# Altium PCB INC-IO1212001.PcbDoc
Units mm, origin at the board's own origin, x right, y up, seen from the top; angles counter-clockwise.
Board outline 135.25 x 80.28 mm, 2 copper layers (Top Layer, Bottom Layer); 161 components, 137 nets, 502 pads, 72 vias.
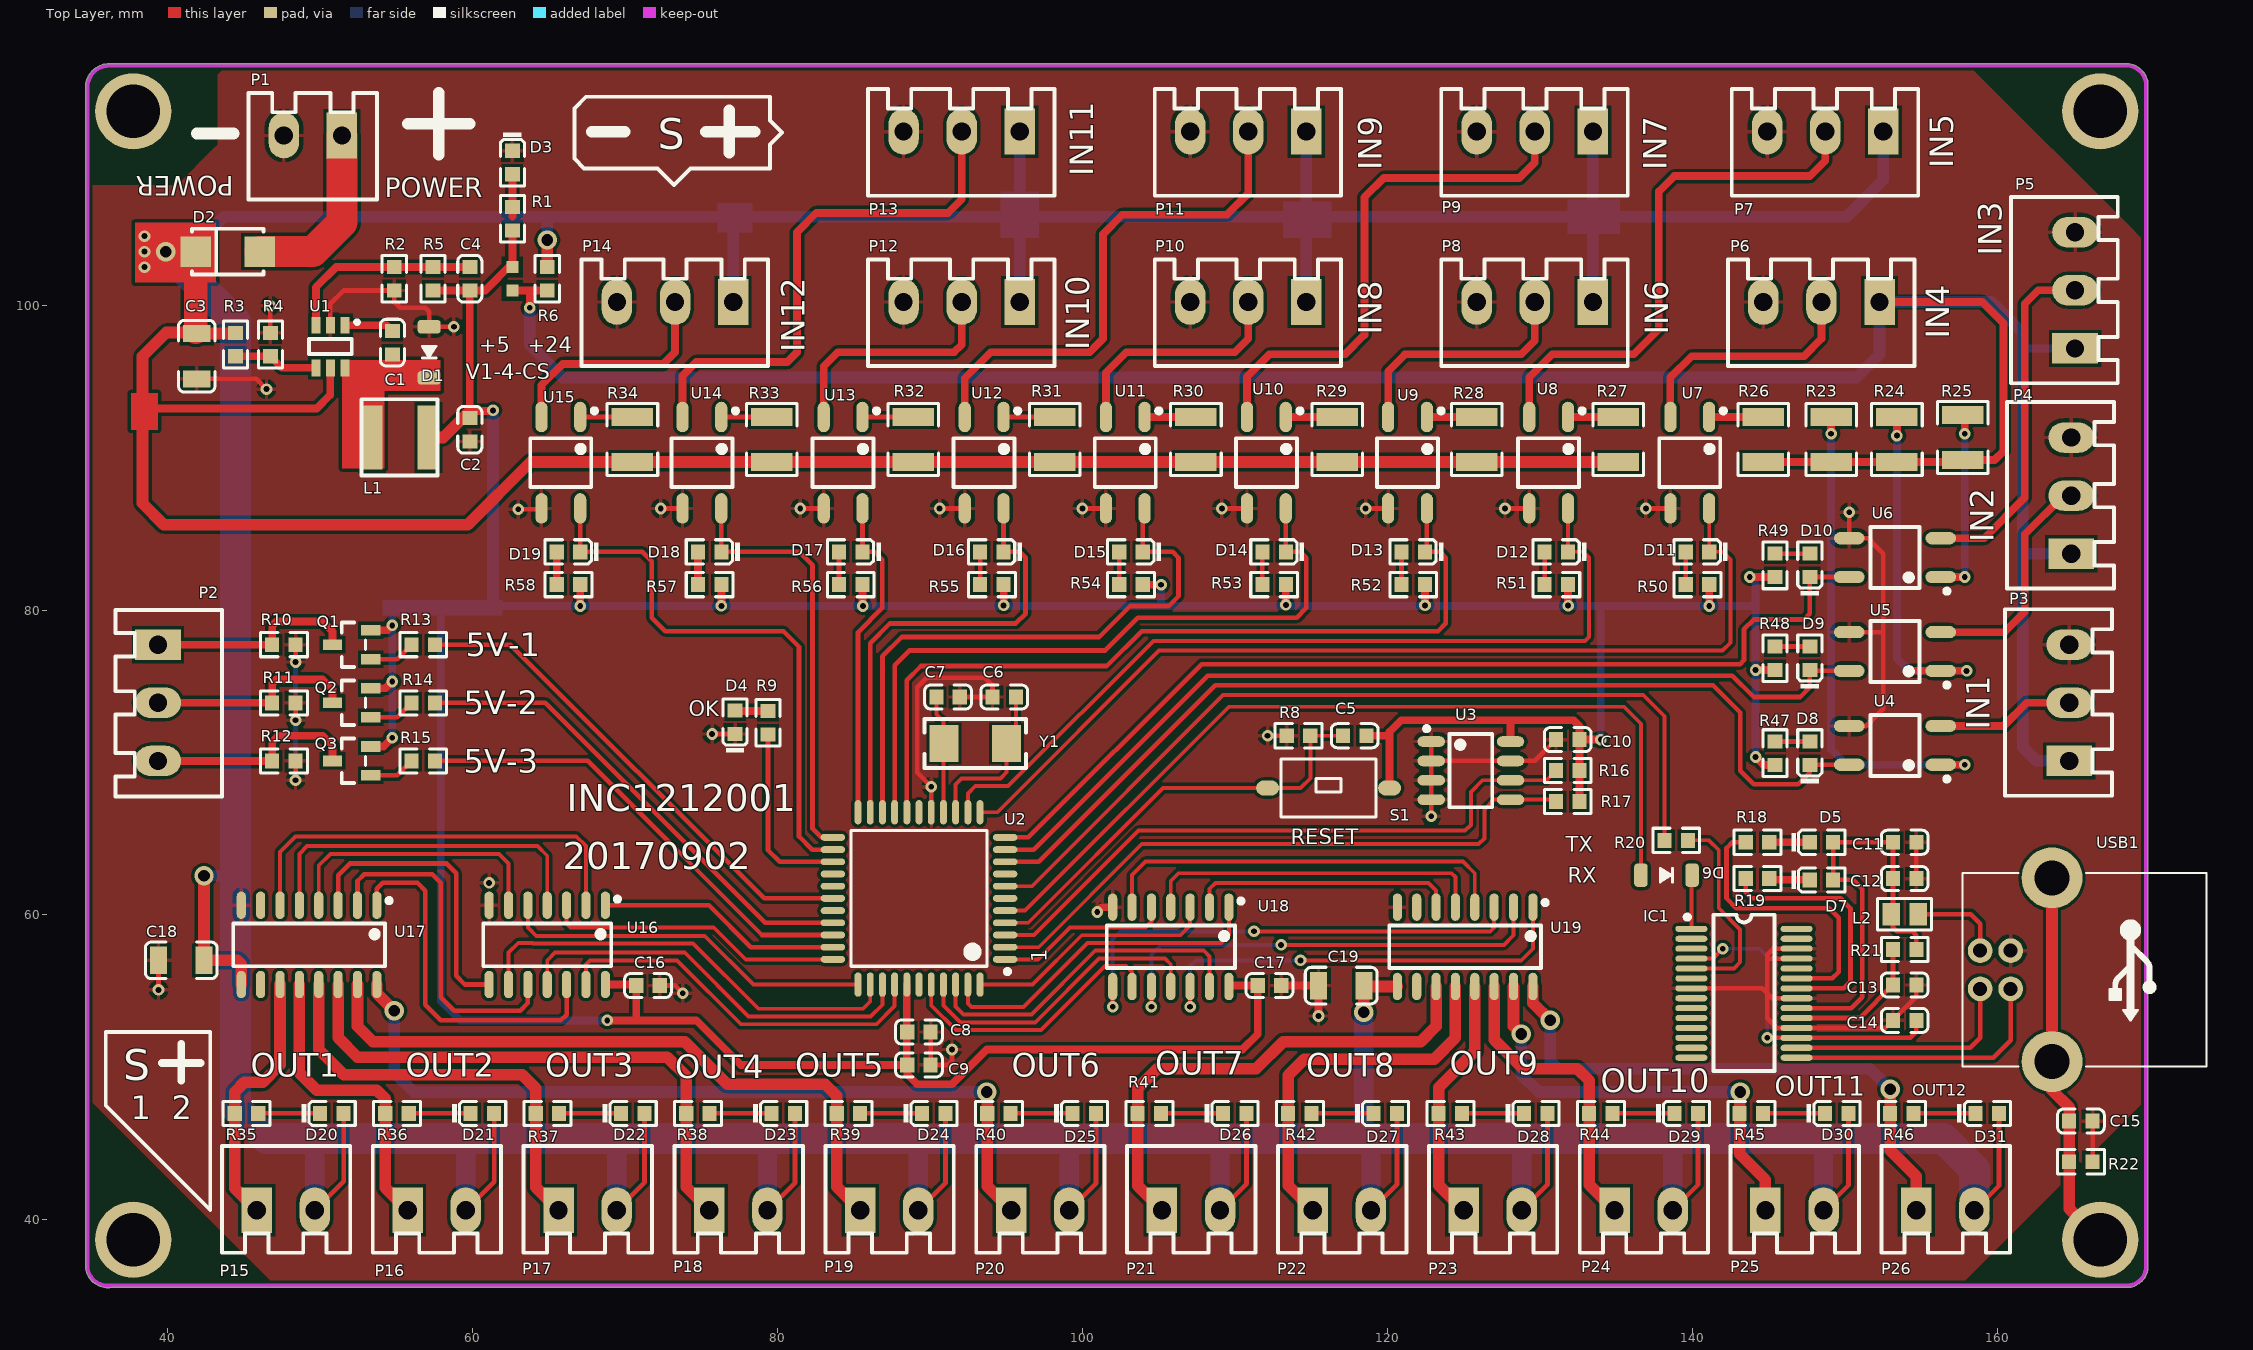
[diagram p0: Top Layer view]
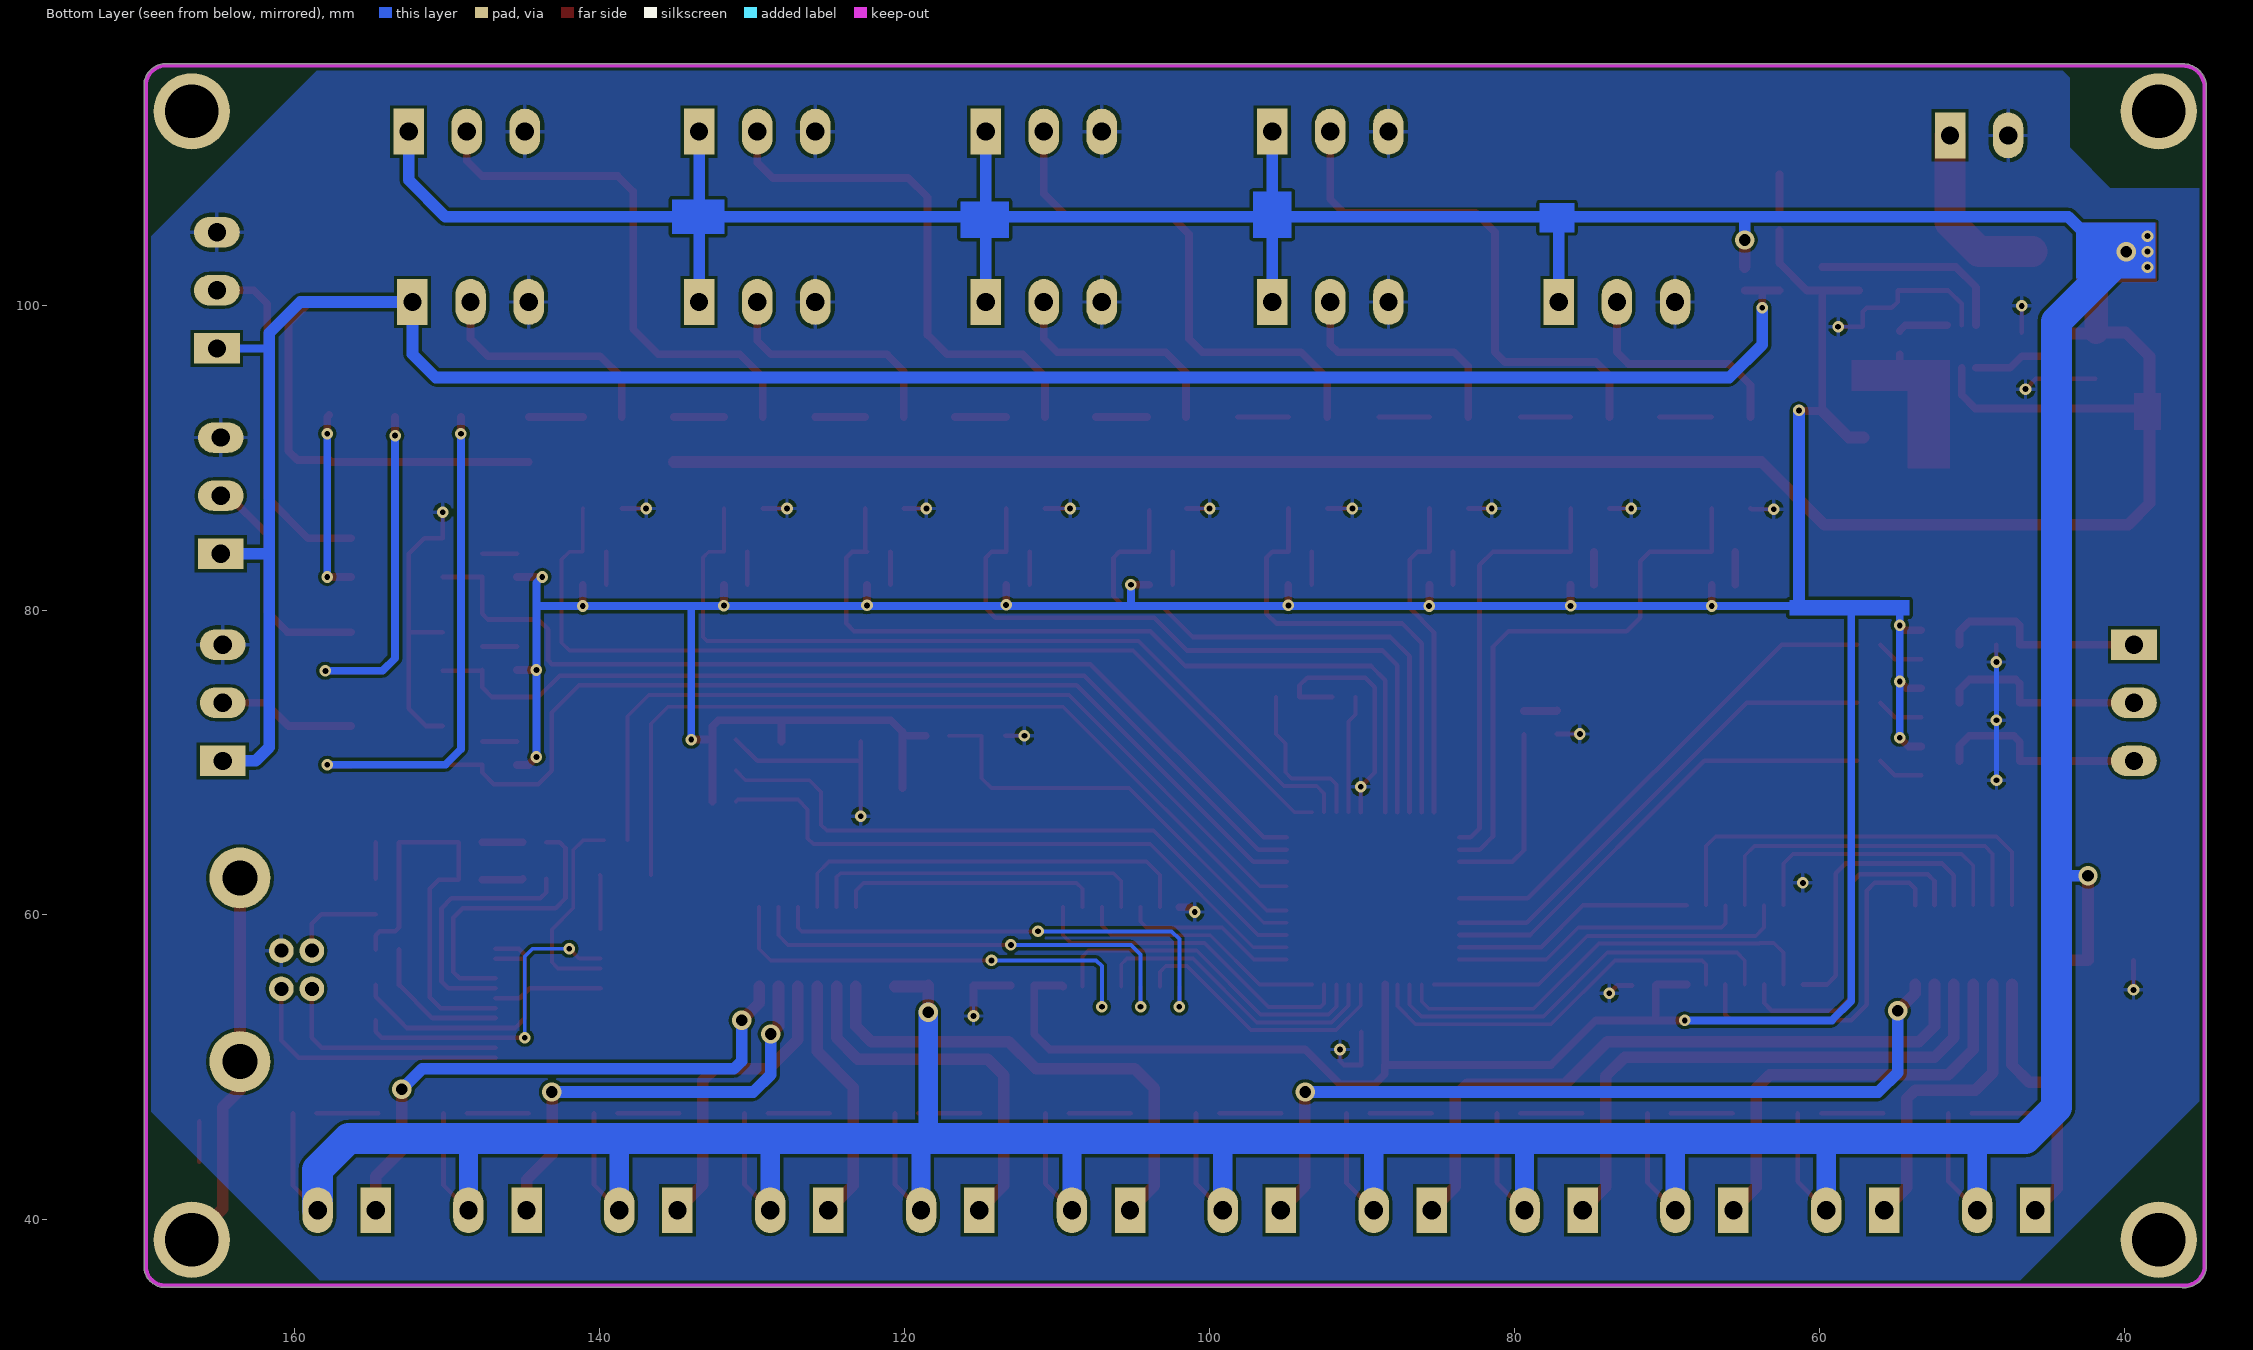
[diagram p1: Bottom Layer view, seen from below]
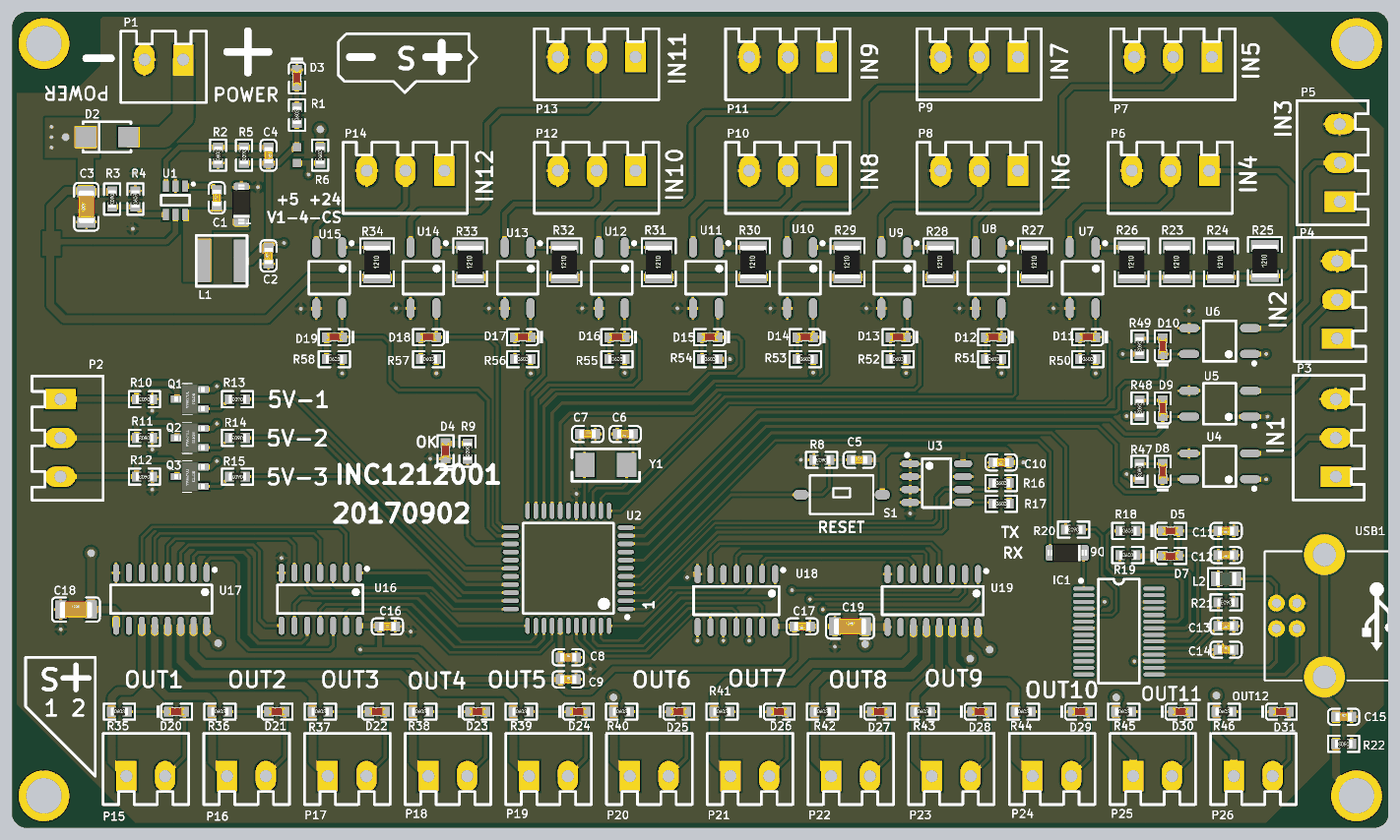
[diagram p2: 3D render of the assembled board from above, using the file's embedded part models]

## Layer stack, top to bottom
Top Solder: solder mask 0.0102, Solder Resist, Dk 3.5
Top Layer: signal copper 0.0356
Dielectric 1: dielectric 0.32, FR-4, Dk 4.8
Bottom Layer: signal copper 0.0356
Bottom Solder: solder mask 0.0102, Solder Resist, Dk 3.5

## Board outline
34.618,114.3 cw(c34.745,114.3) 34.618,114.302 34.618,114.374 cw(c34.745,114.374) 34.623,114.412 cw(c36.171,114.276) 36.036,115.825 cw(c36.074,115.703) 36.074,115.83 36.147,115.83 cw(c36.171,114.276) 36.196,115.83 cw(c36.171,114.276) 36.197,115.83 36.196,115.83 168.267,115.83 cw(c168.436,114.393) 169.871,114.569 cw(c169.745,114.554) 169.872,114.554 169.872,36.958 ccw(c168.51,36.938) 169.872,36.959 169.872,36.958 cw(c168.51,36.938) 169.873,36.938 cw(c168.51,36.938) 168.531,35.576 cw(c168.529,35.703) 168.529,35.576 36.332,35.576 cw(c36.097,37.055) 34.619,36.809 cw(c34.745,36.83) 34.62,36.856 cw(c34.745,36.883) 34.618,36.883

## Design rules (kind name [scope] priority, off if disabled: settings)
Clearance [All] p1: gap=0.203 ignorepadtopadclearanceinfootprint=FALSE except(0: Arc-Hole Track-Hole SMDPad-Hole THPad-Hole Via-Hole Fill-Hole Poly-Hole Region-Hole Text-Hole)
PolygonConnect [All] p1: connectstyle=Relief reliefconductorwidth=0.254 reliefentries=4 polygonreliefangle="90 Angle" airgapwidth=0.254
RoutingVias [All] p1: holewidth=0.381 width=0.762 viastyle="Through Hole" minholewidth=0.711 minwidth=1.27 maxholewidth=0.711 maxwidth=1.27
SolderMaskExpansion [All] p1: expansion=0.102
Width [All] p1: maxlimit=2.032 minlimit=0.254 preferedwidth=0.305 minimp=50.000000 maximp=50.000000 favimp=50.000000
30 further rules are at their usual default settings.

## Components (designator, comment, footprint, x,y, rotation, side; value= is the part's Value field where it differs from the comment)
C1 "100nF (104) 10% 50V" 0603_C 54.737,97.536 r90 top
C2 "10uF(106) ±20% 6.3V" 0603_C 59.817,91.821 r90 top
C3 "10uF(106) ±10% 25V" 1206_C 41.91,96.647 r90 top
C4 "33pF(330) ±5% 50V" 0603_C 59.817,101.727 r270 top
C5 "10uF(106) ±20% 6.3V" 0603_C 117.856,71.755 r0 top
C6 "22pF ±5% 50V" 0603_C 94.869,74.295 r180 top
C7 "22pF ±5% 50V" 0603_C 91.186,74.295 r0 top
C8 "10uF(106) ±20% 6.3V" 0603_C 89.273,52.324 r0 top
C9 "100nF (104) 10% 50V" 0603_C 89.273,50.165 r0 top
C10 "100nF (104) 10% 50V" 0603_C 131.826,71.501 r180 top
C11 "10uF(106) ±20% 6.3V" 0603_C 153.924,64.77 r180 top
C12 "100nF (104) 10% 50V" 0603_C 153.924,62.382 r180 top
C13 "100nF (104) 10% 50V" 0603_C 153.924,53.086 r0 top
C14 "100nF (104) 10% 50V" 0603_C 153.924,55.41 r180 top
C15 "100nF (104) 10% 50V" 0603_C 165.481,46.482 r0 top
C16 "100nF (104) 10% 50V" 0603_C 71.501,55.372 r180 top
C17 "100nF (104) 10% 50V" 0603_C 112.268,55.372 r180 top
C18 "10uF(106) ±10% 25V" 1206_C 40.894,57.023 r0 top
C19 "10uF(106) ±10% 25V" 1206_C 116.967,55.372 r0 top
D1 "1N5819" SOD-123 57.15,96.901 r270 top
D2 "SS34" SMA(DO-214AC)_S1 43.942,103.505 r0 top
D3 "红灯 0603" 0603_LED_S1 62.611,109.347 r270 top
D4 "蓝灯 0603" 0603_LED_S1 77.216,72.636 r90 top
D5 "蓝灯 0603" 0603_LED_S1 148.463,64.77 r0 top
D6 "1N5819" SOD-123 138.303,62.611 r0 top
D7 "红灯 0603" 0603_LED_S1 148.463,62.305 r0 top
D8 "红灯 0603" 0603_LED_S1 147.701,70.612 r90 top
D9 "红灯 0603" 0603_LED_S1 147.701,76.835 r90 top
D10 "红灯 0603" 0603_LED_S1 147.701,82.931 r90 top
D11 "红灯 0603" 0603_LED_S1 140.335,83.82 r180 top
D12 "红灯 0603" 0603_LED_S1 131.08,83.82 r180 top
D13 "红灯 0603" 0603_LED_S1 121.698,83.82 r180 top
D14 "红灯 0603" 0603_LED_S1 112.57,83.82 r180 top
D15 "红灯 0603" 0603_LED_S1 103.188,83.82 r180 top
D16 "红灯 0603" 0603_LED_S1 94.059,83.82 r180 top
D17 "红灯 0603" 0603_LED_S1 84.804,83.82 r180 top
D18 "红灯 0603" 0603_LED_S1 75.549,83.82 r180 top
D19 "红灯 0603" 0603_LED_S1 66.286,83.82 r180 top
D20 "红灯 0603" 0603_LED_S1 50.77,46.99 r0 top
D21 "红灯 0603" 0603_LED_S1 60.64,46.99 r0 top
D22 "红灯 0603" 0603_LED_S1 70.51,46.99 r0 top
D23 "红灯 0603" 0603_LED_S1 80.38,46.99 r0 top
D24 "红灯 0603" 0603_LED_S1 90.25,46.99 r0 top
D25 "红灯 0603" 0603_LED_S1 100.12,46.99 r0 top
D26 "红灯 0603" 0603_LED_S1 109.991,46.99 r0 top
D27 "红灯 0603" 0603_LED_S1 119.861,46.99 r0 top
D28 "红灯 0603" 0603_LED_S1 129.731,46.99 r0 top
D29 "红灯 0603" 0603_LED_S1 139.601,46.99 r0 top
D30 "红灯 0603" 0603_LED_S1 149.471,46.99 r0 top
D31 "红灯 0603" 0603_LED_S1 159.341,46.99 r0 top
IC1 "FT232RL" SSOP-28_208mil 143.383,54.864 r270 top
L1 "3.3uH  ±20%" L5020 55.245,91.313 r0 top
L2 "600Ω ±20% @100MHz" 0805_L 153.924,60.058 r0 top
P1 "Header 2" GX-2P-3.81MM 51.435,111.125 r180 top
P2 "Header 3" GX-3P-3.81MM 39.37,77.724 r270 top
P3 "Header 3" GX-3P-3.81MM 164.719,70.104 r90 top
P4 "Header 3" GX-3P-3.81MM 164.846,83.693 r90 top
P5 "Header 3" GX-3P-3.81MM 165.1,97.155 r90 top
P6 "Header 3" GX-3P-3.81MM 152.273,100.203 r180 top
P7 "Header 3" GX-3P-3.81MM 152.527,111.379 r180 top
P8 "Header 3" GX-3P-3.81MM 133.477,100.203 r180 top
P9 "Header 3" GX-3P-3.81MM 133.477,111.379 r180 top
P10 "Header 3" GX-3P-3.81MM 114.681,100.203 r180 top
P11 "Header 3" GX-3P-3.81MM 114.681,111.379 r180 top
P12 "Header 3" GX-3P-3.81MM 95.885,100.203 r180 top
P13 "Header 3" GX-3P-3.81MM 95.885,111.379 r180 top
P14 "Header 3" GX-3P-3.81MM 77.089,100.203 r180 top
P15 "Header 2" GX-2P-3.81MM 45.847,40.64 r0 top
P16 "Header 2" GX-2P-3.81MM 55.741,40.64 r0 top
P17 "Header 2" GX-2P-3.81MM 65.636,40.64 r0 top
P18 "Header 2" GX-2P-3.81MM 75.53,40.64 r0 top
P19 "Header 2" GX-2P-3.81MM 85.425,40.64 r0 top
P20 "Header 2" GX-2P-3.81MM 95.319,40.64 r0 top
P21 "Header 2" GX-2P-3.81MM 105.214,40.64 r0 top
P22 "Header 2" GX-2P-3.81MM 115.108,40.64 r0 top
P23 "Header 2" GX-2P-3.81MM 125.003,40.64 r0 top
P24 "Header 2" GX-2P-3.81MM 134.897,40.64 r0 top
P25 "Header 2" GX-2P-3.81MM 144.792,40.64 r0 top
P26 "Header 2" GX-2P-3.81MM 154.686,40.64 r0 top
Q1 "SS8550 Y2" SOT-23(SOT-23-3) 52.07,77.724 r0 top
Q2 "SS8550 Y2" SOT-23(SOT-23-3) 52.07,73.914 r0 top
Q3 "SS8550 Y2" SOT-23(SOT-23-3) 52.07,70.104 r0 top
R1 "1.5KΩ (1501) ±1%" 0603_R 62.611,105.664 r90 top
R2 "30K ±1%" 0603_R 54.864,101.727 r90 top
R3 "47KΩ (4702) ±1%" 0603_R 44.45,97.409 r270 top
R4 "10KΩ (1002) ±1%" 0603_R 46.736,97.409 r90 top
R5 "160K ±1%" 0603_R 57.404,101.727 r270 top
R6 "0Ω (0R0) ±1%" 0603_R 64.897,101.727 r90 top
R8 "10KΩ (1002) ±1%" 0603_R 114.173,71.755 r180 top
R9 "1.5KΩ (1501) ±1%" 0603_R 79.375,72.604 r270 top
R10 "1.5KΩ (1501) ±1%" 0603_R 47.625,77.724 r180 top
R11 "1.5KΩ (1501) ±1%" 0603_R 47.625,73.914 r180 top
R12 "1.5KΩ (1501) ±1%" 0603_R 47.625,70.104 r180 top
R13 "4.7KΩ (4701) ±1%" 0603_R 56.769,77.724 r180 top
R14 "4.7KΩ (4701) ±1%" 0603_R 56.769,73.914 r180 top
R15 "4.7KΩ (4701) ±1%" 0603_R 56.769,70.104 r180 top
R16 "4.7KΩ (4701) ±1%" 0603_R 131.826,69.469 r0 top
R17 "4.7KΩ (4701) ±1%" 0603_R 131.826,67.437 r0 top
R18 "1.5KΩ (1501) ±1%" 0603_R 144.272,64.77 r0 top
R19 "1.5KΩ (1501) ±1%" 0603_R 144.272,62.382 r0 top
R20 "330Ω (3300) ±1%" 0603_R 138.938,64.897 r180 top
R21 "10KΩ (1002) ±1%" 0603_R 153.924,57.734 r180 top
R22 "47KΩ (4702) ±1%" 0603_R 165.481,43.815 r180 top
R23 "4.7KΩ (4701) ±1%" 1210_R 149.098,91.186 r90 top
R24 "4.7KΩ (4701) ±1%" 1210_R 153.416,91.186 r90 top
R25 "4.7KΩ (4701) ±1%" 1210_R 157.734,91.313 r90 top
R26 "4.7KΩ (4701) ±1%" 1210_R 144.653,91.186 r90 top
R27 "4.7KΩ (4701) ±1%" 1210_R 135.128,91.186 r90 top
R28 "4.7KΩ (4701) ±1%" 1210_R 125.857,91.186 r90 top
R29 "4.7KΩ (4701) ±1%" 1210_R 116.713,91.186 r90 top
R30 "4.7KΩ (4701) ±1%" 1210_R 107.442,91.186 r90 top
R31 "4.7KΩ (4701) ±1%" 1210_R 98.171,91.186 r90 top
R32 "4.7KΩ (4701) ±1%" 1210_R 88.9,91.186 r90 top
R33 "4.7KΩ (4701) ±1%" 1210_R 79.629,91.186 r90 top
R34 "4.7KΩ (4701) ±1%" 1210_R 70.485,91.186 r90 top
R35 "10KΩ (1002) ±1%" 0603_R 45.168,46.99 r0 top
R36 "10KΩ (1002) ±1%" 0603_R 55.038,46.99 r0 top
R37 "10KΩ (1002) ±1%" 0603_R 64.908,46.99 r0 top
R38 "10KΩ (1002) ±1%" 0603_R 74.778,46.99 r0 top
R39 "10KΩ (1002) ±1%" 0603_R 84.649,46.99 r0 top
R40 "10KΩ (1002) ±1%" 0603_R 94.519,46.99 r0 top
R41 "10KΩ (1002) ±1%" 0603_R 104.389,46.99 r0 top
R42 "10KΩ (1002) ±1%" 0603_R 114.259,46.99 r0 top
R43 "10KΩ (1002) ±1%" 0603_R 124.129,46.99 r0 top
R44 "10KΩ (1002) ±1%" 0603_R 133.999,46.99 r0 top
R45 "10KΩ (1002) ±1%" 0603_R 143.869,46.99 r0 top
R46 "10KΩ (1002) ±1%" 0603_R 153.739,46.99 r0 top
R47 "1.5KΩ (1501) ±1%" 0603_R 145.415,70.612 r270 top
R48 "1.5KΩ (1501) ±1%" 0603_R 145.415,76.835 r270 top
R49 "1.5KΩ (1501) ±1%" 0603_R 145.415,82.931 r270 top
R50 "1.5KΩ (1501) ±1%" 0603_R 140.335,81.661 r0 top
R51 "1.5KΩ (1501) ±1%" 0603_R 131.08,81.661 r0 top
R52 "1.5KΩ (1501) ±1%" 0603_R 121.698,81.661 r0 top
R53 "1.5KΩ (1501) ±1%" 0603_R 112.57,81.661 r0 top
R54 "1.5KΩ (1501) ±1%" 0603_R 103.188,81.661 r0 top
R55 "1.5KΩ (1501) ±1%" 0603_R 94.059,81.661 r0 top
R56 "1.5KΩ (1501) ±1%" 0603_R 84.804,81.661 r0 top
R57 "1.5KΩ (1501) ±1%" 0603_R 75.549,81.661 r0 top
R58 "1.5KΩ (1501) ±1%" 0603_R 66.286,81.661 r0 top
S1 "SW-PB" SW-3*6*2.5 120.142,68.326 r180 top
U1 "MP2451DT-LF-Z" SOT-23-6 50.673,97.282 r90 top
U2 "STC12C5A60S2-35I" LQFP-44_10x10x08P 89.281,61.087 r90 top
U3 "EEPROM/AT24C128" SOIC-8_150mil 125.476,69.469 r270 top
U4 "EL357N(B)(TA)-G" SOP-4_P2.54 153.289,71.12 r180 top
U5 "EL357N(B)(TA)-G" SOP-4_P2.54 153.289,77.279 r180 top
U6 "EL357N(B)(TA)-G" SOP-4_P2.54 153.289,83.439 r180 top
U7 "EL357N(B)(TA)-G" SOP-4_P2.54 139.827,89.662 r270 top
U8 "EL357N(B)(TA)-G" SOP-4_P2.54 130.572,89.662 r270 top
U9 "EL357N(B)(TA)-G" SOP-4_P2.54 121.317,89.662 r270 top
U10 "EL357N(B)(TA)-G" SOP-4_P2.54 112.062,89.662 r270 top
U11 "EL357N(B)(TA)-G" SOP-4_P2.54 102.806,89.662 r270 top
U12 "EL357N(B)(TA)-G" SOP-4_P2.54 93.551,89.662 r270 top
U13 "EL357N(B)(TA)-G" SOP-4_P2.54 84.296,89.662 r270 top
U14 "EL357N(B)(TA)-G" SOP-4_P2.54 75.041,89.662 r270 top
U15 "EL357N(B)(TA)-G" SOP-4_P2.54 65.786,89.662 r270 top
U16 "74HC04" SOIC-14_150mil 64.897,58.039 r180 top
U17 "ULN2003AFWG" SOIC-16_150mil 49.276,58.039 r180 top
U18 "74HC04" SOIC-14_150mil 105.791,57.912 r180 top
U19 "ULN2003AFWG" SOIC-16_150mil 125.095,57.912 r180 top
USB1 "USB-B" USB-b 158.877,57.658 r270 top
Y1 "11.0592MHZ 20PF 20PPM" SMD-5032_2P 92.964,71.247 r0 top

## Footprints (in the part's own frame and the unit in brackets; to place one, negate y for a bottom-side part, rotate by r counter-clockwise, add the part's x,y. Pads: shape width x height; smd on the part's side, far side on the other; paste and mask are expansions set on the pad)
0603_C [mm]
  rect 0.93x0.98 smd: 1(-0.77,0) 2(0.77,0)
  silkscreen extent -1.53,-0.79 1.54,0.79, body extent -0.8,-0.4 0.8,0.4, height 0.3
0603_LED_S1 [mm]
  rect 0.93x0.98 smd: A(0.77,0) K(-0.77,0)
  silkscreen extent -1.98,-0.79 1.54,0.79, body extent -0.8,-0.4 0.8,0.4, height 0.6
0603_R [mm]
  rect 0.93x0.98 smd: 1(-0.77,0) 2(0.77,0)
  silkscreen extent -1.53,-0.79 1.54,0.79, body extent -0.85,-0.4 0.85,0.4, height 0.56
0805_L [mm]
  rect 1.16x1.47 smd: 1(-0.89,0) 2(0.89,0)
  silkscreen extent -1.77,-1.04 1.77,1.03, body extent -1.02,-0.64 1.03,0.64, height 0.6
1206_C [mm]
  rect 1.13x1.8 smd: 1(-1.49,0) 2(1.49,0)
  silkscreen extent -2.36,-1.2 2.35,1.2, body extent -1.6,-0.81 1.6,0.79, height 1
1210_R [mm]
  rect 1.16x2.72 smd: 1(-1.475,0) 2(1.475,0)
  silkscreen extent -2.35,-1.66 2.36,1.66, body extent -1.6,-1.25 1.6,1.25, height 0.6
GX-2P-3.81MM [mm]
  rect 2x3 hole 1.2: 1(0,0)
  oval 2x3 hole 1.2: 2(3.81,0)
  silkscreen extent -2.29,-2.79 6.13,4.21
GX-3P-3.81MM [mm]
  rect 2x3 hole 1.2: 1(0,0)
  oval 2x3 hole 1.2: 2(3.81,0) 3(7.62,0)
  silkscreen extent -2.29,-2.79 9.94,4.21
L5020 [mm]
  rect 1.4x4.2 smd: 1(-1.85,0) 2(1.85,0)
  silkscreen extent -2.54,-2.49 2.46,2.51
LQFP-44_10x10x08P [mm]
  oval 0.45x1.6 smd: 1(-4,-5.65) 2(-3.2,-5.65) 3(-2.4,-5.65) 4(-1.6,-5.65) 5(-0.8,-5.65) 6(0,-5.65) 7(0.8,-5.65) 8(1.6,-5.65) 9(2.4,-5.65) 10(3.2,-5.65) 11(4,-5.65) 23(4,5.65) 24(3.2,5.65) 25(2.4,5.65) 26(1.6,5.65) 27(0.8,5.65) 28(0,5.65) 29(-0.8,5.65) 30(-1.6,5.65) 31(-2.4,5.65) 32(-3.2,5.65) 33(-4,5.65)
  oval 1.6x0.45 smd: 12(5.65,-4) 13(5.65,-3.2) 14(5.65,-2.4) 15(5.65,-1.6) 16(5.65,-0.8) 17(5.65,0) 18(5.65,0.8) 19(5.65,1.6) 20(5.65,2.4) 21(5.65,3.2) 22(5.65,4) 34(-5.65,4) 35(-5.65,3.2) 36(-5.65,2.4) 37(-5.65,1.6) 38(-5.65,0.8) 39(-5.65,0) 40(-5.65,-0.8) 41(-5.65,-1.6) 42(-5.65,-2.4) 43(-5.65,-3.2) 44(-5.65,-4)
  silkscreen extent -4.95,-5.95 4.45,4.45
SMA(DO-214AC)_S1 [mm]
  rect 2x2 smd: 1(2.1,0) 2(-2.1,0)
  silkscreen extent -2.35,-1.5 2.35,1.5
SMD-5032_2P [mm]
  rect 1.9x2.4 smd: 1(-2.05,0) 2(2.05,0)
  silkscreen extent -3.32,-1.6 3.32,1.6
SOD-123 [mil]
  rrect50% 35x60 smd: 1(-66,0) 2(66,0)
  silkscreen extent -16,-18 16,18, body extent -77,-35 77,35, height 46
SOIC-8_150mil [mm]
  oval 0.7x1.8 smd: 1(-1.905,-2.6) 2(-0.635,-2.6) 3(0.635,-2.6) 4(1.905,-2.6) 5(1.905,2.6) 6(0.635,2.6) 7(-0.635,2.6) 8(-1.905,2.6)
  silkscreen extent -2.9,-3.05 2.4,1.4
SOIC-14_150mil [mm]
  oval 0.6x1.8 smd: 1(-3.81,-2.6) 2(-2.54,-2.6) 3(-1.27,-2.6) 4(0,-2.6) 5(1.27,-2.6) 6(2.54,-2.6) 7(3.81,-2.6) 8(3.81,2.6) 9(2.54,2.6) 10(1.27,2.6) 11(0,2.6) 12(-1.27,2.6) 13(-2.54,2.6) 14(-3.81,2.6)
  silkscreen extent -4.75,-3.15 4.2,1.4
SOIC-16_150mil [mm]
  oval 0.6x1.8 smd: 1(-4.445,-2.6) 2(-3.175,-2.6) 3(-1.905,-2.6) 4(-0.635,-2.6) 5(0.635,-2.6) 6(1.905,-2.6) 7(3.175,-2.6) 8(4.445,-2.6) 9(4.445,2.6) 10(3.175,2.6) 11(1.905,2.6) 12(0.635,2.6) 13(-0.635,2.6) 14(-1.905,2.6) 15(-3.175,2.6) 16(-4.445,2.6)
  silkscreen extent -5.4,-3.05 4.97,1.4
SOP-4_P2.54 [mm]
  oval 2x0.8 smd: 1(-3,1.27) 2(-3,-1.27) 3(3,-1.27) 4(3,1.27)
  silkscreen extent -3.55,-2 1.6,2.35
SOT-23(SOT-23-3) [mm]
  rect 1.25x0.7 smd: 1(1.25,-0.95) 2(1.25,0.95) 3(-1.25,0)
  silkscreen extent -0.65,-1.46 0.9,1.46, body extent -1.5,-1.5 1.5,1.5, height 1.3
SOT-23-6 [mm]
  rect 1.1x0.6 smd: 1(1.4,-0.95) 2(1.4,0) 3(1.4,0.95) 4(-1.4,0.95) 5(-1.4,0) 6(-1.4,-0.95)
  silkscreen extent -0.5,-1.87 1.72,1.4
SSOP-28_208mil [mm]
  oval 0.4x2.1 smd mask+0.051: 1(-4.225,-3.45) 2(-3.575,-3.45) 3(-2.925,-3.45) 4(-2.275,-3.45) 5(-1.625,-3.45) 6(-0.975,-3.45) 7(-0.325,-3.45) 8(0.325,-3.45) 9(0.975,-3.45) 10(1.625,-3.45) 11(2.275,-3.45) 12(2.925,-3.45) 13(3.575,-3.45) 14(4.225,-3.45) 15(4.225,3.45) 16(3.575,3.45) 17(2.925,3.45) 18(2.275,3.45) 19(1.625,3.45) 20(0.975,3.45) 21(0.325,3.45) 22(-0.325,3.45) 23(-0.975,3.45) 24(-1.625,3.45) 25(-2.275,3.45) 26(-2.925,3.45) 27(-3.575,3.45) 28(-4.225,3.45)
  silkscreen extent -5.15,-3.86 5.1,2
SW-3*6*2.5 [mm]
  oval 1.5x1 smd: 1(0,0) 2(8,0)
  silkscreen extent 0.89,-1.91 7.11,1.91
USB-b [mm]
  round 1.626 hole 0.914 mask+0.025: 1(0,0) 2(2.5,0) 3(2.5,2) 4(0,2)
  round 4 hole 2.3 mask+0: 5(7.27,4.71) 6(-4.77,4.71)
  silkscreen extent -5.1,-1.16 7.6,14.84, body extent -5.94,-0.71 8.44,14.99, height 11.5

## Part data
C1 C4: library part "0603 10nF (103) 10% 50V", "贴片电容"
C2 C3 C8 C9 C10 C11 C12 C13 C14 C15 C16 C17 C18 C19: library part Cap, "Capacitor"
C5: library part "0603 10uF (106) 10% 10V", "贴片电容"
C6 C7: library part CAP, "Capacitor"
D1 D2 D6: library part "D Schottky", "Schottky Diode"
D3 D7 D8 D9 D10 D11 D12 D13 D14 D15 D16 D17 D18 D19 D20 D21 D22 D23 D24 D25 D26 D27 D28 D29 D30 D31: library part "0603 红灯", "发光二极管"
D4 D5: library part "0603 蓝灯", "发光二极管"
L1: library part Inductor, "Inductor"
L2 R9 R18 R19 R20 R21 R22: library part Res2, "Resistor"
P1 P15 P16 P17 P18 P19 P20 P21 P22 P23 P24 P25 P26: "Header, 2-Pin"
P2 P3 P4 P5 P6 P7 P8 P9 P10 P11 P12 P13 P14: "Header, 3-Pin"
Q1 Q2 Q3: library part "SOT-23 SS8550 Y2", "三极管"
R1 R8 R10 R11 R12 R13 R14 R15 R16 R17 R35 R36 R37 R38 R39 R40 R41 R42 R43 R44 R45 R46: library part "0603 1KΩ (1001) 1%", "贴片电阻"
R2 R5 R6 R23 R24 R25 R26 R27 R28 R29 R30 R31 R32 R33 R34 R47 R48 R49 R50 R51 R52 R53 R54 R55 R56 R57 R58: library part "0603 18KΩ (1802) 1%", "贴片电阻"
R3 R4: library part "0603 100KΩ (1003) 1%", "贴片电阻"
S1: "Switch"
U1: "DC-DCоƬ"
U2: "MCU"
U3: library part EEPROM/AT24C256C-SSHL-T, "EEPROM"
U4 U5 U6 U7 U8 U9 U10 U11 U12 U13 U14 U15: "贴片光耦"
U17 U19: "大电流驱动"
USB1: library part USB-6
Y1: library part "SMD-5032_2P 11.0592MHZ 20PF 20PPM", "贴片晶振"

## Free pads (board coordinates)
  round 5 hole 3.5: 0(37.745,38.703) 0(37.745,112.703) 0(166.745,38.703) 0(166.745,112.703)
  rect 0.8x0.8 smd: 1(62.611,102.497) 2(62.611,100.957)

## Via types
v1: diameter 0.762, hole 0.381, Top Layer to Bottom Layer, tented both sides, 62 vias
v2: diameter 1.27, hole 0.762, Top Layer to Bottom Layer, tented both sides, 10 vias

## Nets (pads, with @x,y where several pads share a name; then routed paths per layer and width w, separated by ;. In a path a pad name is that pad's centre, name@x,y a point inside that pad or via, vN(x,y) a via of type N, cw(c..) or ccw(c..) an arc to the next point about the centre after c; other vN are vias at no path point)
5V_1: P2.1 Q1.3 R10.2 | length 14
  Top Layer w0.508: P2.1 R10.2 46.855,78.986 47.117,79.248 50.165,79.248 50.82,78.593 Q1.3
5V_2: P2.2 Q2.3 R11.2 | length 14
  Top Layer w0.508: P2.2 R11.2 46.855,75.176 47.117,75.438 50.165,75.438 50.82,74.783 Q2.3
5V_3: P2.3 Q3.3 R12.2 | length 14.1
  Top Layer w0.508: P2.3 R12.2 46.855,71.366 47.244,71.755 50.165,71.755 50.82,71.1 Q3.3
+5V: C2.2 C4.2 C5.2 C8.1 C9.1 C10.1 C16.2 C17.2 L1.2 pad.1 Q1.2 Q2.2 Q3.2 R1.1 R5.2 R16.2 R17.2 R47.2 R48.2 R49.2 R50.2 R51.2 R52.2 R53.2 R54.2 R55.2 R56.2 R57.2 R58.2 S1.1 U2.38 U3.8 U16.14 U18.14 | length 301.8
  Top Layer w0.508: Q3.2 54.163,71.054 v1(54.737,71.628) ; Q2.2 54.29,74.864 v1(54.737,75.311) ; Q1.2 54.417,78.674 v1(54.737,78.994) ; R5.2 C4.2 ; v1(61.341,93.091) 61.307,93.057 59.817,93.057 C4.2 ; R1.1 62.611,102.743 60.825,100.957 C4.2 ; v1(67.056,80.264) R58.2 ; U16.14 C16.2@70.664,55.439 ; v1(68.834,53.086) 74.676,53.086 77.597,50.165 C9.1 ; 70.731,53.094 C16.2 ; v1(76.319,80.272) R57.2 ; v1@85.574,80.288 R56.2 ; U2.38 88.481,50.187 C9.1 ; v1(94.829,80.304) R55.2 ; R54.2 v1(105.156,81.661) ; U18.14 109.661,55.372 C17.2 111.498,52.189 110.49,51.181 93.726,51.181 91.44,48.895 89.154,48.895 88.503,49.546 C9.1 ; v1(113.34,80.335) R53.2 ; C5.2 120.142,71.755 ; S1.1 120.142,71.755 ; v1(122.468,80.304) R52.2 ; U3.8 128.076,72.711 128.016,72.771 ; v1(131.85,80.288) R51.2 ; R17.2 R16.2 C10.1 ; v1(133.985,71.501) C10.1 ; v1(141.105,80.264) R50.2 ; v1(143.764,82.169) 145.407,82.169 R49.2 ; v1(144.145,70.358) 144.661,69.842 R47.2 ; v1(144.145,76.065) R48.2 ; 120.142,71.755 120.142,72.009 120.904,72.771 128.016,72.771 ; 128.016,72.771 132.207,72.771 132.596,72.382 C10.1
  Top Layer w0.762: L1.2 58.073,91.313 59.817,93.057
  Bottom Layer w0.508: v1(54.737,71.628) v1(54.737,75.311) v1(54.737,78.994) 54.737,80.391 57.912,80.391 ; 59.055,80.264 v1(67.056,80.264) v1(85.598,80.264) 105.156,80.264 ; 61.341,80.391 57.912,80.391 ; v1(68.834,53.086) 59.182,53.086 57.912,54.356 57.912,80.391 ; v1(105.156,81.661) 105.156,80.264 ; v1(133.985,71.501) 133.985,80.264 ; v1(143.764,82.169) 144.145,81.788 144.145,80.391 ; v1(144.145,70.358) v1(144.145,76.065) 144.145,80.391 ; 105.156,80.264 131.85,80.264 v1(141.105,80.264) 144.018,80.264 144.145,80.391
  Bottom Layer w0.762: 61.341,80.391 v1(61.341,93.091)
+24V: C3.2 C18.2 C19.2 D2.2 D20.A D21.A D22.A D23.A D24.A D25.A D26.A D27.A D28.A D29.A D30.A D31.A P7.1 P8.1 P9.1 P10.1 P11.1 P12.1 P13.1 P14.1 P15.2 P16.2 P17.2 P18.2 P19.2 P20.2 P21.2 P22.2 P23.2 P24.2 P25.2 P26.2 R3.1 R6.2 R27.1 R28.1 R29.1 R30.1 R31.1 R32.1 R33.1 R34.1 U1.5 U17.9 U19.9 | length 629.5
  Top Layer w0.305: P15.2 51.54,42.523 D20.A ; P16.2 61.41,42.498 D21.A ; P17.2 71.28,42.474 D22.A ; P18.2 81.15,42.45 D23.A ; P19.2 91.02,42.425 D24.A ; P20.2 100.89,42.401 D25.A ; P21.2 110.761,42.377 D26.A ; P22.2 120.631,42.352 D27.A ; P23.2 130.501,42.328 D28.A ; P24.2 140.371,42.304 D29.A ; P25.2 150.241,42.279 D30.A ; P26.2 160.111,42.255 D31.A
  Top Layer w0.508: 38.354,93.218 49.784,93.218 50.673,94.107 U1.5 ; 40.547,98.205 40.479,98.137 C3.2
  Top Layer w0.762: C3.2@41.842,98.205 40.547,98.205 39.912,98.205 38.354,96.647 38.354,93.218 38.354,86.995 39.751,85.598 59.69,85.598 63.803,89.711 R34.1 R33.1 R32.1 R31.1 R30.1 R29.1 R28.1 R27.1 ; C3.2 44.408,98.137 R3.1 ; v2(42.384,62.577) C18.2 44.577,57.023 44.831,56.769 U17.9 ; R6.2 v2(64.897,104.267) ; v2(118.457,53.628) C19.2 118.517,55.312 U19.9
  Top Layer w1.524: C3.2@41.842,98.205 D2.2
  Bottom Layer w0.762: 42.164,104.267 43.688,105.791 64.897,105.791 ; v2(42.384,62.577) 44.289,62.577 ; 49.53,45.339 49.657,45.212 ; 59.309,45.339 59.551,45.097 ; v2(64.897,104.267) 64.897,105.791 ; P14.1 77.089,105.664 ; 79.34,45.304 79.375,45.339 ; 89.235,45.293 89.281,45.339 ; P12.1 95.885,105.791 ; P13.1 95.885,105.791 ; P10.1 114.681,105.791 ; P11.1 114.681,105.791 ; P8.1 133.477,105.791 ; P9.1 133.477,105.791 ; P7.1 152.527,108.204 150.114,105.791 133.477,105.791 ; 64.897,105.791 95.885,105.791 ; 95.885,105.791 114.681,105.791 ; 114.681,105.791 133.477,105.791
  Bottom Layer w1.27: P15.2 49.657,45.212 ; P16.2 59.551,45.097 ; P17.2 69.446,45.316 ; P18.2 79.34,45.304 ; P19.2 89.235,45.293 ; P20.2 99.129,45.27 ; P21.2 109.024,45.154 ; 118.457,45.432 v2(118.457,53.628) ; P22.2 118.918,45.039 ; P23.2 128.813,45.05 ; P24.2 138.707,44.981 ; P25.2 148.602,45.224
  Bottom Layer w2.032: v2(39.878,103.505) 44.45,98.933 44.45,47.371 46.482,45.339 49.53,45.339 59.309,45.339 79.375,45.339 89.281,45.339 156.464,45.339 158.496,43.307 P26.2
  other v1: 38.481,102.489 38.481,103.505 38.481,104.521
GND: C2.1 C3.1 C6.2 C7.2 C8.2 C9.2 C10.2 C11.1 C12.1 C13.1 C14.1 C15.2 C16.1 C17.1 C18.1 C19.1 D1.1 D3.K D4.K IC1.7 IC1.18 IC1.21 IC1.25 IC1.26 P1.2 P3.3 P4.3 P5.3 P6.3 P7.3 P8.3 P9.3 P10.3 P11.3 P12.3 P13.3 P14.3 R2.1 R4.2 R8.2 R10.1 R11.1 R12.1 R22.1 U1.2 U2.16 U3.1 U3.2 U3.3 U3.4 U3.7 U4.3 U5.3 U6.3 U7.3 U8.3 U9.3 U10.3 U11.3 U12.3 U13.3 U14.3 U15.3 U16.7 U17.8 U18.7 U19.8 USB1.4 | length 142.3
  Top Layer w0.305: v1(39.404,55.084) C18.1 ; C3.1 45.813,95.157 v1(46.482,94.488) ; R4.2 v1(46.736,99.949) ; v1(48.387,68.834) 48.395,68.842 R12.1 ; v1(48.395,72.771) R11.1 ; v1(48.395,76.589) R10.1 ; U1.2 50.673,100.076 51.554,100.957 R2.1 54.864,100.203 55.245,99.822 56.896,99.822 57.15,99.568 D1.1 v1(58.776,98.577) ; v1(62.992,86.614) 64.468,86.614 U15.3 ; C16.1 73.279,55.372 v1(73.787,54.864) ; v1(72.342,86.662) U14.3 ; v1(75.708,71.866) D4.K ; v1(81.486,86.662) U13.3 ; C8.2 C9.2 91.186,50.165 91.44,50.419 v1(91.44,51.181) ; U2.16 v1(90.081,68.415) 89.154,69.342 89.154,74.93 89.789,75.565 93.599,75.565 94.099,75.065 C6.2 C7.2 ; v1(90.63,86.662) U12.3 ; v1(99.997,86.662) U11.3 ; v1(109.141,86.662) U10.3 ; v1(112.141,71.755) R8.2 ; v1(118.57,86.662) U9.3 ; v1(122.876,66.481) U3.4 U3.3 U3.2 ; U3.1 U3.2 ; v1(127.714,86.662) U8.3 ; C10.2 129.659,70.104 U3.7 U3.2 ; v1(136.954,86.662) U7.3 ; IC1.7 144.582,55.189 144.907,54.864 ; 144.918,57.139 IC1.25 ; IC1.21 145.232,54.539 144.907,54.864 ; IC1.26 145.292,57.789 144.907,57.404 144.907,54.864 ; U4.3 151.384,72.39 152.527,73.533 152.527,83.693 151.511,84.709 U6.3 v1(150.289,86.408) ; U5.3 152.463,78.549 ; C14.1 154.694,54.626 C13.1 152.657,52.589 IC1.18 145.531,52.589 144.907,53.213 144.907,54.864 ; C12.1 C11.1 ; R22.1 C15.2
  Top Layer w0.508: v1(100.965,60.198) 101.279,60.512 U18.7 ; C17.1 C19.1 v1(115.477,53.374)
  Bottom Layer w0.305: v1(48.387,68.834) 48.387,76.581 v1(48.395,76.589)
  other v1: 61.087,62.103
IN1: D8.K U2.9 U4.4 | length 65.9
  Top Layer w0.305: U2.9 97.142,63.487 108.712,75.057 141.351,75.057 143.129,73.279 143.129,69.469 144.018,68.58 146.939,68.58 147.701,69.342 D8.K 147.709,69.85 U4.4
IN2: D9.K U2.10 U5.4 | length 62.1
  Top Layer w0.305: U2.10 96.799,64.287 108.204,75.692 142.621,75.692 144.018,74.295 147.066,74.295 147.701,74.93 D9.K 147.757,76.01 U5.4
IN3: D10.K U2.11 U6.4 | length 65
  Top Layer w0.305: U2.11 96.456,65.087 107.823,76.454 143.129,76.454 143.383,76.708 143.383,78.74 144.018,79.375 147.32,79.375 147.701,79.756 D10.K 147.709,82.169 U6.4
IN4: D11.K U2.12 U7.4 | length 63.7
  Top Layer w0.254: U2.12 94.423,66.737 105.029,77.343 141.986,77.343 142.494,77.851 142.494,83.312 141.986,83.82 D11.K 141.105,86.654 U7.4
IN5: D12.K U2.13 U8.4 | length 55.8
  Top Layer w0.254: U2.13 92.481,67.97 92.964,68.453 95.123,68.453 104.648,77.978 132.969,77.978 133.223,78.232 133.223,83.439 132.842,83.82 D12.K 131.85,86.654 U8.4
IN6: D13.K U2.18 U9.4 | length 54.3
  Top Layer w0.305: U2.18 88.481,75.4 89.408,76.327 101.6,76.327 103.886,78.613 123.317,78.613 123.825,79.121 123.825,83.439 123.444,83.82 D13.K 122.587,83.939 U9.4
IN7: D14.K U2.19 U10.4 | length 45.8
  Top Layer w0.305: U2.19 87.681,76.378 88.646,77.343 101.473,77.343 103.632,79.502 114.046,79.502 114.681,80.137 114.681,83.439 114.3,83.82 D14.K 113.34,86.654 U10.4
IN8: D15.K U2.20 U11.4 | length 39
  Top Layer w0.305: U2.20 86.881,76.975 88.138,78.232 101.092,78.232 103.124,80.264 105.664,80.264 106.299,80.899 106.299,83.439 105.918,83.82 D15.K U11.4@103.957,86.543
IN9: D16.K U2.21 U12.4 | length 30.2
  Top Layer w0.305: U2.21 86.081,77.826 87.376,79.121 95.631,79.121 96.266,79.756 96.266,83.439 95.885,83.82 D16.K 94.821,83.828 U12.4
IN10: D17.K U2.22 U13.4 | length 21.6
  Top Layer w0.305: U2.22 85.281,78.55 86.868,80.137 86.868,83.312 86.36,83.82 D17.K 85.574,86.654 U13.4
IN11: D18.K U2.23 U14.4 | length 28
  Top Layer w0.305: U14.4 76.311,83.828 D18.K 81.407,83.82 82.296,82.931 82.296,65.659 82.868,65.087 U2.23
IN12: D19.K U2.24 U15.4 | length 37
  Top Layer w0.305: U15.4 D19.K 71.12,83.82 71.755,83.185 71.755,79.502 72.644,78.613 80.391,78.613 81.407,77.597 81.407,65.151 82.271,64.287 U2.24
INPUT1: P3.2 U4.2 | length 9.1
  Top Layer w0.508: U4.2 160.401,72.39 161.925,73.914 P3.2
INPUT2: P4.2 U5.2 | length 15.2
  Top Layer w0.508: U5.2 160.464,78.549 161.798,79.883 161.798,84.963 164.338,87.503 P4.2
INPUT3: P5.2 U6.2 | length 23
  Top Layer w0.508: U6.2 159.131,84.709 161.798,87.376 161.798,100.076 162.687,100.965 P5.2
INPUT4: P6.2 U7.2 | length 16
  Top Layer w0.508: U7.2 138.557,95.25 139.954,96.647 147.32,96.647 148.463,97.79 P6.2
INPUT5: P7.2 U8.2 | length 35.1
  Top Layer w0.508: U8.2 129.302,95.266 130.81,96.774 136.144,96.774 137.795,98.425 137.795,107.442 138.811,108.458 147.701,108.458 148.717,109.474 P7.2
INPUT6: P8.2 U9.2 | length 16
  Top Layer w0.508: U9.2 120.047,95.663 121.158,96.774 128.778,96.774 129.667,97.663 P8.2
INPUT7: P9.2 U10.2 | length 34.6
  Top Layer w0.508: U10.2 110.792,95.298 112.268,96.774 117.221,96.774 118.491,98.044 118.491,107.061 119.761,108.331 128.651,108.331 129.667,109.347 P9.2
INPUT8: P10.2 U11.2 | length 15.6
  Top Layer w0.508: U11.2 101.536,95.567 102.87,96.901 109.982,96.901 110.871,97.79 P10.2
INPUT9: P11.2 U12.2 | length 34.2
  Top Layer w0.508: U12.2 92.281,95.202 93.98,96.901 100.457,96.901 101.346,97.79 101.346,104.648 102.616,105.918 109.474,105.918 110.871,107.315 P11.2
INPUT10: P12.2 U13.2 | length 15.8
  Top Layer w0.508: U13.2 83.026,95.98 83.947,96.901 91.567,96.901 92.075,97.409 P12.2
INPUT11: P13.2 U14.2 | length 34.9
  Top Layer w0.508: U14.2 73.771,95.361 74.676,96.266 80.645,96.266 81.28,96.901 81.28,104.775 82.55,106.045 91.186,106.045 92.075,106.934 P13.2
INPUT12: P14.2 U15.2 | length 15
  Top Layer w0.508: U15.2 64.516,94.742 65.913,96.139 72.517,96.139 73.279,96.901 P14.2
LED: R9.2 U2.25 | length 12.2
  Top Layer w0.305: R9.2 79.375,64.249 80.137,63.487 U2.25
MCU_RX: D6.1 U2.5 | length 57.6
  Top Layer w0.254: U2.5 96.228,60.287 109.601,73.66 135.509,73.66 136.627,72.542 D6.1
MCU_TX: R20.2 U2.7 | length 57.1
  Top Layer w0.254: U2.7 96.685,61.887 109.22,74.422 136.779,74.422 138.168,73.033 R20.2
NetC1_1: C1.1 D1.2 L1.1 U1.6 | length 3.8
  Top Layer w0.508: 54.734,95.882 54.737,95.885 ; C1.1 54.737,95.885 ; D1.2 55.016,95.225 54.737,95.504 54.737,95.885
NetC1_2: C1.2 U1.1 | length 3.3
  Top Layer w0.508: U1.1 54.361,98.682 C1.2
NetC4_1: C4.1 R2.2 R5.1 U1.3 | length 13.1
  Top Layer w0.508: U1.3 49.723,101.158 51.062,102.497 R2.2 C4.1
NetC5_1: C5.1 R8.1 S1.2 U2.4 | length 28.9
  Top Layer w0.254: U2.4 96.444,59.487 105.283,68.326 S1.2 114.3,68.326 114.943,68.969 R8.1 C5.1
NetC6_1: C6.1 U2.14 Y1.2 | length 10.7
  Top Layer w0.254: U2.14 91.681,68.567 92.075,68.961 94.615,68.961 95.014,69.36 Y1.2 95.639,71.872 C6.1
NetC7_1: C7.1 U2.15 Y1.1 | length 7.8
  Top Layer w0.254: C7.1 90.416,73.16 90.881,72.695 U2.15
NetC11_2: C11.2 C12.2 D5.A D7.A IC1.20 L2.1 R21.1 | length 28.5
  Top Layer w0.305: IC1.20 150.409,53.889 151.13,54.61 151.13,61.722 150.547,62.305 D7.A D5.A C11.2 C12.2 153.154,60.058 153.154,59.19 153.416,58.928 154.432,58.928 154.694,58.666 R21.1
NetC14_2: C14.2 IC1.19 R21.2 | length 9.5
  Top Layer w0.305: IC1.19 150.983,53.239 C14.2 R21.2
NetC15_1: C15.1 pad.0@166.745,38.703 R22.2 USB1.5 USB1.6 | length 25
  Top Layer w0.762: USB1.6 USB1.5 163.587,48.503 164.711,47.379 R22.2 164.711,40.737 pad.0@166.745,38.703
NetD3_A: D3.A R1.2 | length 2.8
  Top Layer w0.508: 62.611,105.816 R1.2 D3.A
NetD4_A: D4.A R9.1 | length 2.2
  Top Layer w0.508: D4.A 77.248,73.374 R9.1
NetD5_K: D5.K R18.2 | length 2.7
  Top Layer w0.508: R18.2 D5.K
NetD6_1: D6.2 IC1.1 | length 3.5
  Top Layer w0.254: IC1.1 139.933,62.565 D6.2
NetD7_K: D7.K R19.2 | length 2.7
  Top Layer w0.508: R19.2 145.119,62.305 D7.K
NetD8_A: D8.A R47.1 | length 2.3
  Top Layer w0.305: R47.1 D8.A
NetD9_A: D9.A R48.1 | length 2.3
  Top Layer w0.305: R48.1 D9.A
NetD10_A: D10.A R49.1 | length 2.3
  Top Layer w0.305: R49.1 D10.A
NetD11_A: D11.A R50.1 | length 2.2
  Top Layer w0.305: R50.1 D11.A
NetD12_A: D12.A R51.1 | length 2.2
  Top Layer w0.305: R51.1 D12.A
NetD13_A: D13.A R52.1 | length 2.2
  Top Layer w0.305: R52.1 D13.A
NetD14_A: D14.A R53.1 | length 2.2
  Top Layer w0.305: R53.1 D14.A
NetD15_A: D15.A R54.1 | length 2.2
  Top Layer w0.305: R54.1 D15.A
NetD16_A: D16.A R55.1 | length 2.2
  Top Layer w0.305: R55.1 D16.A
NetD17_A: D17.A R56.1 | length 2.2
  Top Layer w0.305: R56.1 D17.A
NetD18_A: D18.A R57.1 | length 2.2
  Top Layer w0.508: R57.1 D18.A
NetD19_A: D19.A R58.1 | length 2.2
  Top Layer w0.508: R58.1 D19.A
NetD20_K: D20.K R35.2 | length 4.1
  Top Layer w0.305: R35.2 D20.K
NetD21_K: D21.K R36.2 | length 4.1
  Top Layer w0.305: R36.2 D21.K
NetD22_K: D22.K R37.2 | length 4.1
  Top Layer w0.305: R37.2 D22.K
NetD23_K: D23.K R38.2 | length 4.1
  Top Layer w0.305: R38.2 D23.K
NetD24_K: D24.K R39.2 | length 4.1
  Top Layer w0.305: R39.2 D24.K
NetD25_K: D25.K R40.2 | length 4.1
  Top Layer w0.305: R40.2 D25.K
NetD26_K: D26.K R41.2 | length 4.1
  Top Layer w0.305: R41.2 D26.K
NetD27_K: D27.K R42.2 | length 4.1
  Top Layer w0.305: R42.2 D27.K
NetD28_K: D28.K R43.2 | length 4.1
  Top Layer w0.305: R43.2 D28.K
NetD29_K: D29.K R44.2 | length 4.1
  Top Layer w0.305: R44.2 D29.K
NetD30_K: D30.K R45.2 | length 4.1
  Top Layer w0.305: R45.2 D30.K
NetD31_K: D31.K R46.2 | length 4.1
  Top Layer w0.305: R46.2 D31.K
NetIC1_5: IC1.5 R20.1 | length 13.6
  Top Layer w0.254: R20.1 141.097,64.897 141.732,64.262 141.732,60.452 143.129,59.055 143.129,56.896 142.722,56.489 IC1.5
NetIC1_22: IC1.22 R19.1 | length 16.7
  Top Layer w0.305: R19.1 143.502,61.476 143.891,61.087 149.733,61.087 150.368,60.452 150.368,55.626 149.931,55.189 IC1.22
NetIC1_23: IC1.23 R18.1 | length 19.1
  Top Layer w0.305: R18.1 142.621,64.77 142.24,64.389 142.24,61.087 142.875,60.452 148.971,60.452 149.606,59.817 149.606,56.261 149.184,55.839 IC1.23
NetQ1_1: Q1.1 R13.2 | length 3.1
  Top Layer w0.305: Q1.1 55.049,76.774 R13.2
NetQ2_1: Q2.1 R14.2 | length 3.1
  Top Layer w0.305: Q2.1 55.049,72.964 R14.2
NetQ3_1: Q3.1 R15.2 | length 3.1
  Top Layer w0.305: Q3.1 55.049,69.154 R15.2
NetR3_2: R3.2 R4.1 U1.4 | length 5.6
  Top Layer w0.508: R3.2 R4.1 47.493,95.882 U1.4
NetR23_2: R23.2 U4.1 | length 32.6
  Top Layer w0.508: v1(149.098,91.567) R23.2 ; U4.1 v1(157.861,69.85)
  Bottom Layer w0.508: v1(149.098,91.567) 149.098,70.866 150.114,69.85 v1(157.861,69.85)
NetR24_2: R24.2 U5.1 | length 24.2
  Top Layer w0.508: v1@153.416,91.694 R24.2 ; 154.242,76.01 U5.1 v1(157.988,76.01)
  Bottom Layer w0.508: v1(153.416,91.44) 153.416,76.835 154.242,76.01 v1(157.988,76.01)
NetR25_2: R25.2 U6.1 | length 12.2
  Top Layer w0.508: U6.1 v1(157.861,82.169) ; R25.2 157.861,92.661 v1(157.861,91.567)
  Bottom Layer w0.508: v1(157.861,82.169) v1(157.861,91.567)
NetR26_2: R26.2 U7.1 | length 3.6
  Top Layer w0.508: U7.1 U7.1 R26.2
NetR27_2: R27.2 U8.1 | length 3.3
  Top Layer w0.508: U8.1 131.843,92.661 R27.2
NetR28_2: R28.2 U9.1 | length 3.3
  Top Layer w0.508: U9.1 122.588,92.661 R28.2
NetR29_2: R29.2 U10.1 | length 3.4
  Top Layer w0.508: U10.1 U10.1 R29.2
NetR30_2: R30.2 U11.1 | length 3.4
  Top Layer w0.508: U11.1 U11.1 R30.2
NetR31_2: R31.2 U12.1 | length 3.4
  Top Layer w0.305: U12.1 94.822,92.661 R31.2
NetR32_2: R32.2 U13.1 | length 3.3
  Top Layer w0.305: U13.1 U13.1 R32.2
NetR33_2: R33.2 U14.1 | length 3.3
  Top Layer w0.305: U14.1 U14.1 R33.2
NetR34_2: R34.2 U15.1 | length 3.4
  Top Layer w0.305: U15.1 U15.1 R34.2
O1: U16.2 U17.6 | length 28.1
  Top Layer w0.254: U17.6 47.371,64.135 48.387,65.151 66.802,65.151 67.437,64.516 U16.2
O2: U16.4 U17.5 | length 23.3
  Top Layer w0.254: U17.5 48.641,64.008 49.149,64.516 64.262,64.516 64.897,63.881 U16.4
O3: U16.6 U17.4 | length 18.4
  Top Layer w0.254: U17.4 49.911,63.246 50.673,64.008 61.722,64.008 62.357,63.373 U16.6
O4: U16.8 U17.3 | length 19.4
  Top Layer w0.305: U17.3 51.181,62.611 51.943,63.373 58.293,63.373 58.928,62.738 58.928,56.007 59.496,55.439 U16.8
O5: U16.10 U17.2 | length 22.5
  Top Layer w0.305: U17.2 52.451,62.23 52.883,62.662 57.353,62.662 57.912,62.103 57.912,54.61 58.801,53.721 63.119,53.721 63.627,54.229 U16.10
O6: U16.12 U17.1 | length 23.9
  Top Layer w0.305: U17.1 53.721,61.722 54.102,62.103 56.388,62.103 56.896,61.595 56.896,54.102 57.912,53.086 65.786,53.086 66.167,53.467 U16.12
O7: U18.2 U19.6 | length 17.5
  Top Layer w0.254: U18.2 108.331,61.722 108.712,62.103 122.682,62.103 123.19,61.595 U19.6
O8: U18.4 U19.5 | length 22.7
  Top Layer w0.254: U18.4 105.791,62.23 106.299,62.738 124.206,62.738 124.46,62.484 U19.5
O9: U18.6 U19.4 | length 27.5
  Top Layer w0.254: U18.6 103.251,62.611 104.14,63.5 124.968,63.5 125.73,62.738 U19.4
O10: U18.8 U19.3 | length 32.4
  Top Layer w0.254: v1(101.981,53.975) U18.8 ; v1(111.252,58.928) 126.746,58.928 127,59.182 U19.3
  Bottom Layer w0.254: v1(101.981,53.975) 101.981,58.42 102.489,58.928 v1(111.252,58.928)
O11: U18.10 U19.2 | length 30.9
  Top Layer w0.254: v1(104.521,53.975) U18.10 ; v1(113.03,58.039) 127.635,58.039 128.27,58.674 U19.2
  Bottom Layer w0.254: v1(104.521,53.975) 104.521,57.404 105.156,58.039 v1(113.03,58.039)
O12: U18.12 U19.1 | length 29.7
  Top Layer w0.254: v1(107.061,53.975) U18.12 ; v1(114.3,57.023) 128.778,57.023 129.54,57.785 U19.1
  Bottom Layer w0.254: v1(107.061,53.975) 107.061,56.642 107.442,57.023 v1(114.3,57.023)
OUT1: U2.32 U16.1 | length 16.1
  Top Layer w0.305: U16.1 75.505,60.639 78.257,57.887 U2.32
OUT2: U2.33 U16.3 | length 19.6
  Top Layer w0.254: U16.3 66.167,59.436 66.421,59.182 75.819,59.182 77.914,57.087 U2.33
OUT3: U2.34 U16.5 | length 24.7
  Top Layer w0.254: U16.5 63.627,59.182 64.177,58.632 75.226,58.632 78.421,55.437 U2.34
OUT4: U2.35 U16.9 | length 29.2
  Top Layer w0.254: U16.9 62.357,57.531 62.992,58.166 63.925,58.166 63.966,58.124 74.464,58.124 78.74,53.848 85.598,53.848 86.081,54.331 U2.35
OUT5: U2.36 U16.11 | length 27.2
  Top Layer w0.254: U16.11 64.897,57.023 65.405,57.531 73.914,57.531 78.105,53.34 86.106,53.34 86.881,54.115 U2.36
OUT5V_1: R13.1 U2.28 | length 33
  Top Layer w0.305: R13.1 62.484,77.724 79.121,61.087 U2.28
OUT5V_2: R14.1 U2.30 | length 32.1
  Top Layer w0.305: R14.1 64.77,73.914 79.197,59.487 U2.30
OUT5V_3: R15.1 U2.31 | length 30.8
  Top Layer w0.305: R15.1 67.564,70.104 78.981,58.687 U2.31
OUT6: U2.37 U16.13 | length 25.3
  Top Layer w0.254: U16.13 67.437,56.769 67.691,57.023 73.406,57.023 77.597,52.832 86.487,52.832 87.681,54.026 U2.37
OUT7: U2.43 U18.1 | length 22.2
  Top Layer w0.254: U2.43 92.481,54.204 92.71,53.975 96.139,53.975 100.33,58.166 109.093,58.166 109.601,58.674 U18.1
OUT8: U2.44 U18.3 | length 16.6
  Top Layer w0.254: U2.44 96.712,55.437 99.949,58.674 105.664,58.674 106.426,58.674 107.061,59.309 U18.3
OUT9: U2.1 U18.5 | length 11.6
  Top Layer w0.254: U2.1 97.092,57.087 99.187,59.182 104.14,59.182 104.521,59.563 U18.5
OUT10: U2.40 U18.9 | length 18.1
  Top Layer w0.254: U2.40 90.081,54.064 91.694,52.451 97.282,52.451 101.473,56.642 102.87,56.642 103.251,56.261 U18.9
OUT11: U2.41 U18.11 | length 20.1
  Top Layer w0.254: U2.41 90.881,54.07 91.992,52.959 96.901,52.959 101.092,57.15 105.41,57.15 105.791,56.769 U18.11
OUT12: U2.42 U18.13 | length 22.2
  Top Layer w0.254: U2.42 91.681,53.988 92.202,53.467 96.647,53.467 100.838,57.658 107.95,57.658 108.331,57.277 U18.13
OUTPUT1: P15.1 R35.1 U17.11 | length 17.3
  Top Layer w0.762: P15.1 44.398,42.089 R35.1 44.398,48.387 45.033,49.022 46.228,49.022 47.371,50.165 U17.11
OUTPUT2: P16.1 R36.1 U17.12 | length 20
  Top Layer w0.762: U17.12 48.641,49.657 49.784,48.514 53.721,48.514 54.268,47.967 R36.1 54.268,42.113 P16.1
OUTPUT3: P17.1 R37.1 U17.13 | length 28.2
  Top Layer w0.762: U17.13 49.911,51.181 51.562,49.53 63.246,49.53 64.138,48.638 R37.1 64.138,42.138 P17.1
OUTPUT4: P18.1 R38.1 U17.14 | length 36.8
  Top Layer w0.762: U17.14 51.181,51.943 52.451,50.673 72.771,50.673 74.008,49.436 R38.1 74.008,42.162 P18.1
OUTPUT5: P19.1 R39.1 U17.15 | length 44.2
  Top Layer w0.762: U17.15 52.451,52.705 53.467,51.689 73.914,51.689 76.708,48.895 83.117,48.895 83.879,48.133 R39.1 83.879,42.186 P19.1
OUTPUT6: P20.1 R40.1 U17.16 | length 54.1
  Top Layer w0.762: U17.16 53.721,54.864 v2(54.864,53.721) ; v2(93.726,48.387) 93.749,48.364 R40.1 93.749,42.211 P20.1
  Bottom Layer w0.762: v2(54.864,53.721) 54.864,49.657 56.134,48.387 v2(93.726,48.387)
OUTPUT7: P21.1 R41.1 U19.11 | length 32.5
  Top Layer w0.762: P21.1 103.619,42.235 R41.1 103.619,48.628 104.902,49.911 111.379,49.911 113.157,51.689 122.174,51.689 123.19,52.705 U19.11
OUTPUT8: P22.1 R42.1 U19.12 | length 24.9
  Top Layer w0.762: P22.1 113.489,42.259 R42.1 113.489,49.481 114.554,50.546 123.063,50.546 124.46,51.943 U19.12
OUTPUT9: P23.1 R43.1 U19.13 | length 16.3
  Top Layer w0.762: P23.1 123.359,42.284 R43.1 123.359,48.683 125.73,51.054 U19.13
OUTPUT10: P24.1 R44.1 U19.14 | length 20
  Top Layer w0.762: U19.14 127,51.816 128.905,49.911 132.461,49.911 133.229,49.143 R44.1 133.229,42.308 P24.1
OUTPUT11: P25.1 R45.1 U19.15 | length 29.3
  Top Layer w0.762: U19.15 128.27,52.705 v2(128.778,52.197) ; v2(143.129,48.387) 143.099,48.357 R45.1 143.099,44.323 144.792,42.631 P25.1
  Bottom Layer w0.762: v2(128.778,52.197) 128.778,49.53 129.921,48.387 v2(143.129,48.387)
OUTPUT12: P26.1 R46.1 U19.16 | length 37.1
  Top Layer w0.762: U19.16 129.54,54.229 v2(130.683,53.086) ; v2(152.969,48.58) R46.1 152.969,44.577 154.686,42.86 P26.1
  Bottom Layer w0.762: v2(130.683,53.086) 130.683,50.419 131.191,49.911 151.638,49.911 v2(152.969,48.58)
SCL: R16.1 U2.3 U3.6 | length 41.9
  Top Layer w0.254: U2.3 96.831,58.687 103.676,65.532 125.095,65.532 125.476,65.913 125.476,68.072 126.238,68.834 U3.6 130.421,68.834 R16.1
SDA: R17.1 U2.2 U3.5 | length 41.3
  Top Layer w0.254: U2.2 97.13,57.887 103.886,64.643 125.984,64.643 126.365,65.024 126.365,66.929 127,67.564 U3.5 130.929,67.564 R17.1
USB_D+: IC1.15 USB1.3 | length 17.9
  Top Layer w0.305: IC1.15 159.732,50.639 160.877,51.784 USB1.3
USB_D-: IC1.16 USB1.2 | length 15.5
  Top Layer w0.305: IC1.16 158.223,51.289 158.877,51.943 USB1.2
USB_VBUS: L2.2 USB1.1 | length 6.2
  Top Layer w0.305: L2.2@154.694,60.058 158.255,60.058 158.877,59.436 USB1.1
V_COM: P3.1 P4.1 P5.1 P6.1 pad.2 R6.1 R23.1 R24.1 R25.1 R26.1 | length 179.8
  Top Layer w0.508: pad.2 63.754,100.957 ; v1(63.754,99.822) 63.754,100.957 ; R6.1 63.754,100.957 ; R26.1 R23.1 R24.1 R25.1@157.734,89.711 ; P6.1 159.004,100.203 160.401,98.806 160.401,90.424 159.815,89.838 R25.1
  Bottom Layer w0.508: 161.671,97.155 P5.1
  Bottom Layer w0.762: v1(63.754,99.822) 63.754,97.409 65.913,95.25 150.749,95.25 152.273,96.774 P6.1 159.639,100.203 161.671,98.171 161.671,97.155 161.671,83.693 ; P3.1 162.56,70.104 161.671,70.993 161.671,83.693 ; P4.1 161.671,83.693
VCCIO: C13.2 IC1.4 IC1.17 | length 21.5
  Top Layer w0.254: IC1.4 141.34,57.139 v1(141.986,57.785)
  Top Layer w0.305: v1(144.907,51.943) 144.911,51.939 IC1.17 154.301,51.939 154.694,52.332 C13.2
  Bottom Layer w0.254: v1(141.986,57.785) 144.399,57.785 144.907,57.277 v1(144.907,51.943)
VIN: D2.1 P1.1 | length 11.9
  Top Layer w2.032: D2.1 49.53,103.505 51.435,105.41 P1.1
pads on no net: IC1.2 IC1.3 IC1.6 IC1.8 IC1.9 IC1.10 IC1.11 IC1.12 IC1.13 IC1.14 IC1.24 IC1.27 IC1.28 U2.6 U2.8 U2.17 U2.26 U2.27 U2.29 U2.39 U17.7 U17.10 U19.7 U19.10

## Polygon pours and split planes (outlines as drawn)
GND on Bottom Layer "Top Layer-No Net" (solid, remove dead copper, pour order 4): 35.015,107.672 40.91,107.672 43.323,110.085 43.577,110.339 43.577,112.498 43.577,114.917 44.339,115.679 126.883,115.679 127.016,115.546 127.149,115.679 157.242,115.679 158.252,115.679 168.926,105.005 170.015,103.916 170.015,101.322 170.015,47.69 158.004,35.679 47.191,35.679 35.015,47.855 35.015,107.672
GND on Top Layer "Top Layer-No Net" (solid, remove dead copper, pour order 2): 34.727,107.858 40.622,107.858 43.035,110.271 43.289,110.525 43.289,112.684 43.289,115.103 44.051,115.865 126.595,115.865 126.728,115.732 126.861,115.865 156.954,115.865 157.964,115.865 168.638,105.191 169.727,104.102 169.727,101.508 169.727,47.876 157.716,35.865 46.903,35.865 34.727,48.041 34.727,107.858

## Keep-outs
Keep-Out Layer:
  lines w0.254: 34.745,36.83 ccw(c36.097,37.055) 36.322,35.703 ; 34.745,36.883 34.745,114.374 ; 34.745,114.3 cw(c36.171,114.276) 36.195,115.703 ; 35.925,35.703 168.529,35.703 ccw(c168.51,36.938) 169.745,36.957 ; 36.074,115.703 168.596,115.703 ; 168.275,115.703 cw(c168.436,114.393) 169.745,114.554 169.745,36.919

## Other copper
Top Layer:
  rectangle net +24V: 37.846,101.473 43.18,105.41
  rectangle net +24V: 37.592,91.821 39.37,94.234
  rectangle net NetC1_1: 51.435,94.361 57.912,96.393
  rectangle net NetC1_1: 51.435,89.281 54.229,96.393
Bottom Layer:
  rectangle net +24V: 37.973,101.727 43.18,105.41
  rectangle net +24V: 94.615,104.394 97.155,107.442
  rectangle net +24V: 113.157,104.394 116.332,106.807
  rectangle net +24V: 131.826,104.648 135.255,106.934
  rectangle net +24V: 76.073,104.775 78.359,106.68
  rectangle net +5V: 54.102,79.629 61.976,80.645

## Silkscreen, mask and mechanical layers (free items; w line width, h text height)
Top Overlay:
  lines w0.254: 35.941,47.498 35.941,48.768 35.941,52.324 42.799,52.324 42.799,48.768 42.799,40.64 35.941,47.498 ; 66.675,109.601 67.31,108.966 72.136,108.966 73.215,107.886 74.295,108.966 79.502,108.966 79.502,110.522 80.296,111.316 79.502,112.109 79.502,113.665 67.437,113.665 66.675,112.903 66.675,109.601
  lines w0.508: 39.624,50.292 42.164,50.292 ; 40.894,49.149 40.894,51.562
  lines w0.762: 41.91,111.252 44.323,111.252 ; 55.753,111.887 59.817,111.887 ; 57.785,109.855 57.785,113.919 ; 67.818,111.379 69.977,111.379 ; 75.311,111.379 78.486,111.379 ; 76.835,109.982 76.835,112.776
  text "S" at 72.136,110.236 h2.03
  text "IN5" at 157.099,108.966 h1.52 r90
  text "IN9" at 119.634,108.839 h1.52 r90
  text "IN7" at 138.303,108.839 h1.52 r90
  text "POWER" at 44.323,108.458 h1.27 r180
  text "IN11" at 100.711,108.458 h1.52 r90
  text "POWER" at 54.229,107.061 h1.27
  text "IN3" at 160.274,103.251 h1.52 r90
  text "IN8" at 119.634,98.044 h1.52 r90
  text "IN6" at 138.43,98.044 h1.52 r90
  text "IN4" at 156.845,97.79 h1.52 r90
  text "IN10" at 100.457,97.028 h1.52 r90
  text "+5" at 60.452,96.901 h1.02
  text "+24" at 63.627,96.901 h1.02
  text "IN12" at 81.788,96.901 h1.52 r90
  text "V1-4-CS" at 59.563,95.123 h1.02
  text "IN2" at 159.766,84.455 h1.52 r90
  text "5V-1" at 59.563,76.962 h1.52
  text "5V-2" at 59.436,73.152 h1.52
  text "OK" at 74.168,73.025 h1.02
  text "IN1" at 159.512,72.136 h1.52 r90
  text "5V-3" at 59.436,69.342 h1.52
  text "INC1212001" at 66.167,66.802 h1.78
  text "RESET" at 113.665,64.643 h1.02
  text "TX" at 131.699,64.135 h1.02
  text "20170902" at 65.913,62.992 h1.78
  text "RX" at 131.826,62.103 h1.02
  text "1" at 97.663,56.896 h1.02 r90
  text "OUT7" at 104.775,49.53 h1.52
  text "OUT9" at 124.079,49.53 h1.52
  text "OUT1" at 45.466,49.403 h1.52
  text "OUT2" at 55.626,49.403 h1.52
  text "OUT3" at 64.77,49.403 h1.52
  text "OUT5" at 81.153,49.403 h1.52
  text "OUT6" at 95.377,49.403 h1.52
  text "OUT8" at 114.681,49.403 h1.52
  text "OUT4" at 73.279,49.276 h1.52
  text "S" at 37.084,49.149 h2.03
  text "OUT10" at 133.985,48.387 h1.52
  text "OUT11" at 145.415,48.133 h1.27
  text "OUT12" at 154.432,48.133 h0.76
  text "1" at 37.592,46.609 h1.52
  text "2" at 40.259,46.609 h1.52